# Altium PCB STM32智能储物柜.PcbDoc
Units mil, origin at the board's own origin, x right, y up, seen from the top; angles counter-clockwise.
Board outline 3605.31 x 2966.03 mil, 4 copper layers (Top Layer, GND02, PWR03, Bottom Layer), stack 23.754 mil thick; 30 components, 40 nets, 227 pads, 2 vias.
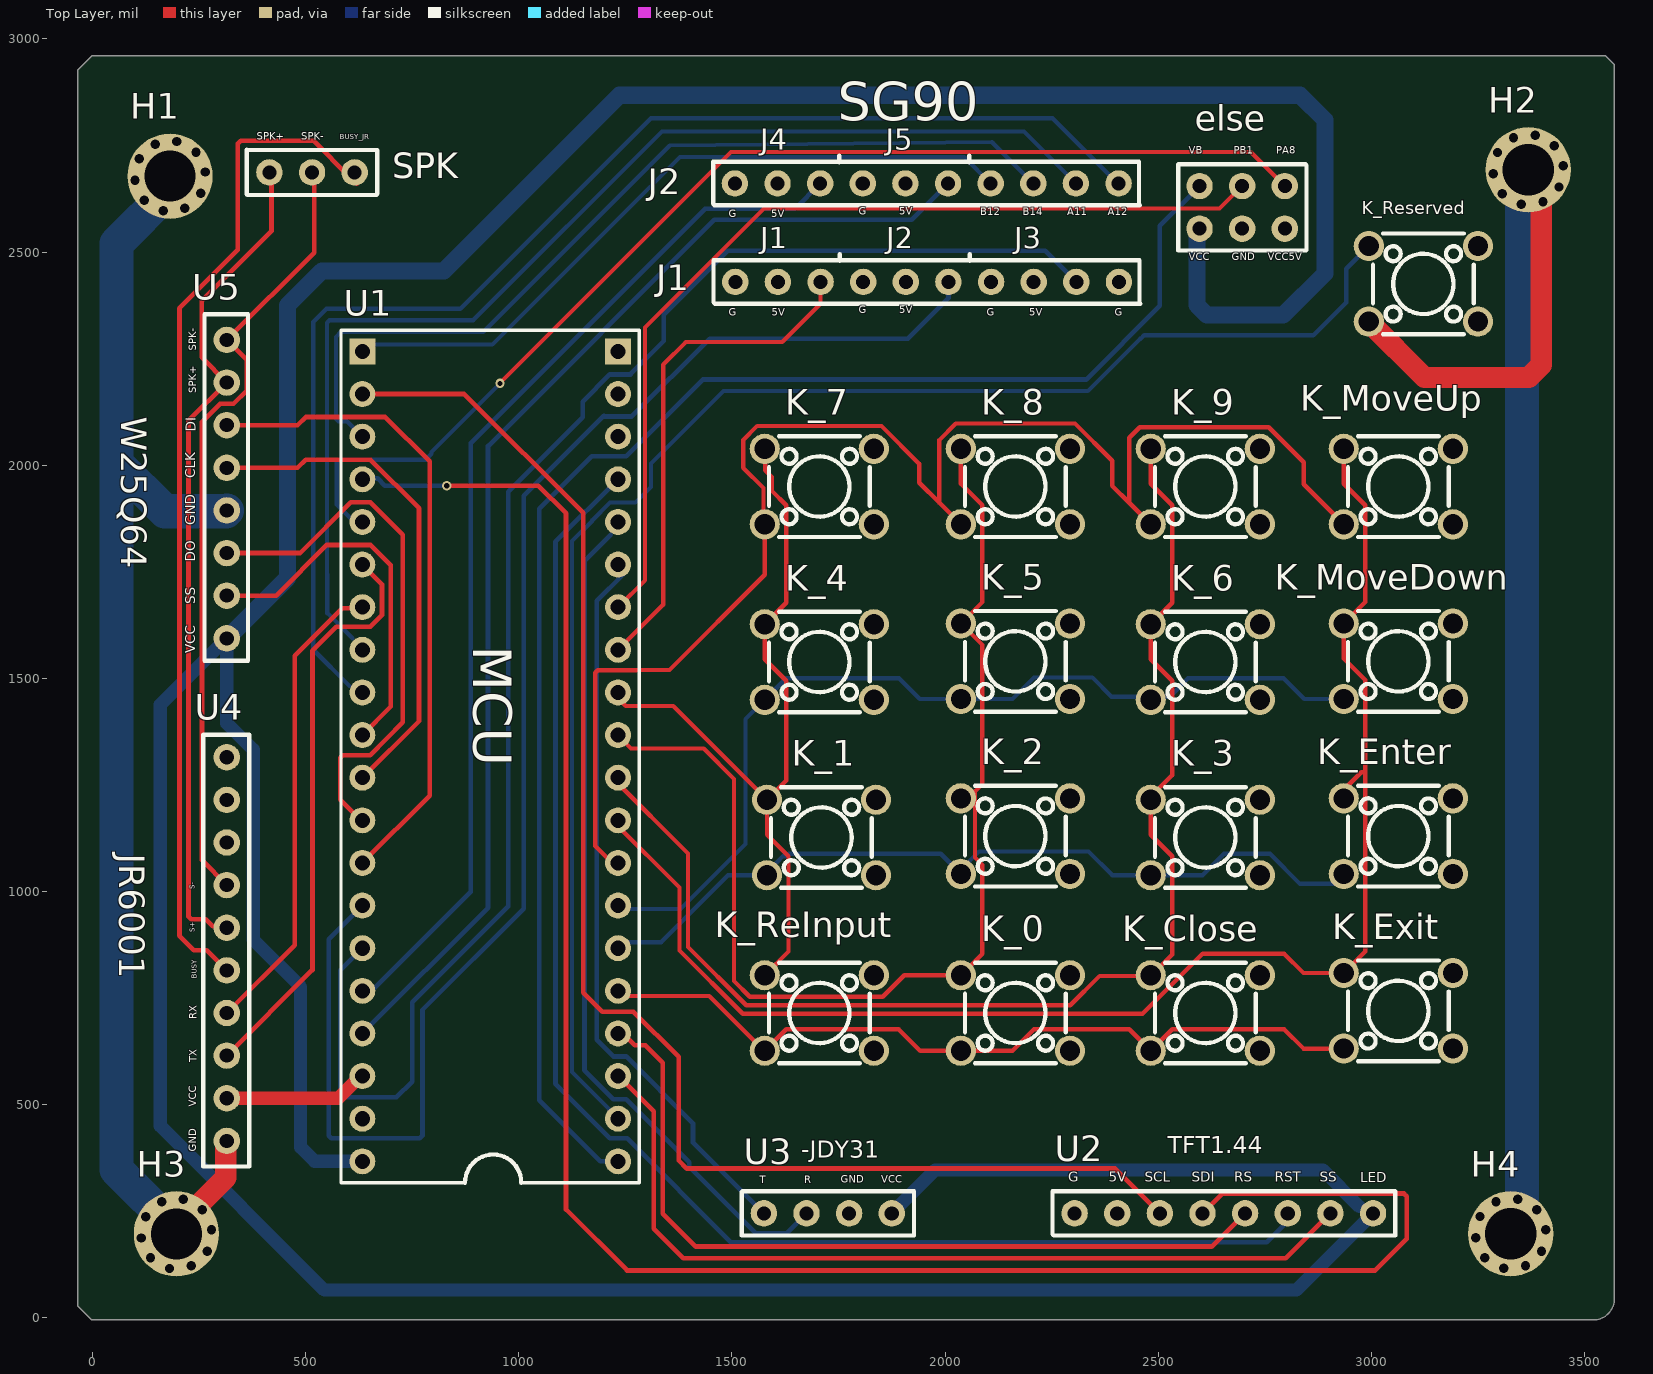
[diagram p0: Top Layer view]
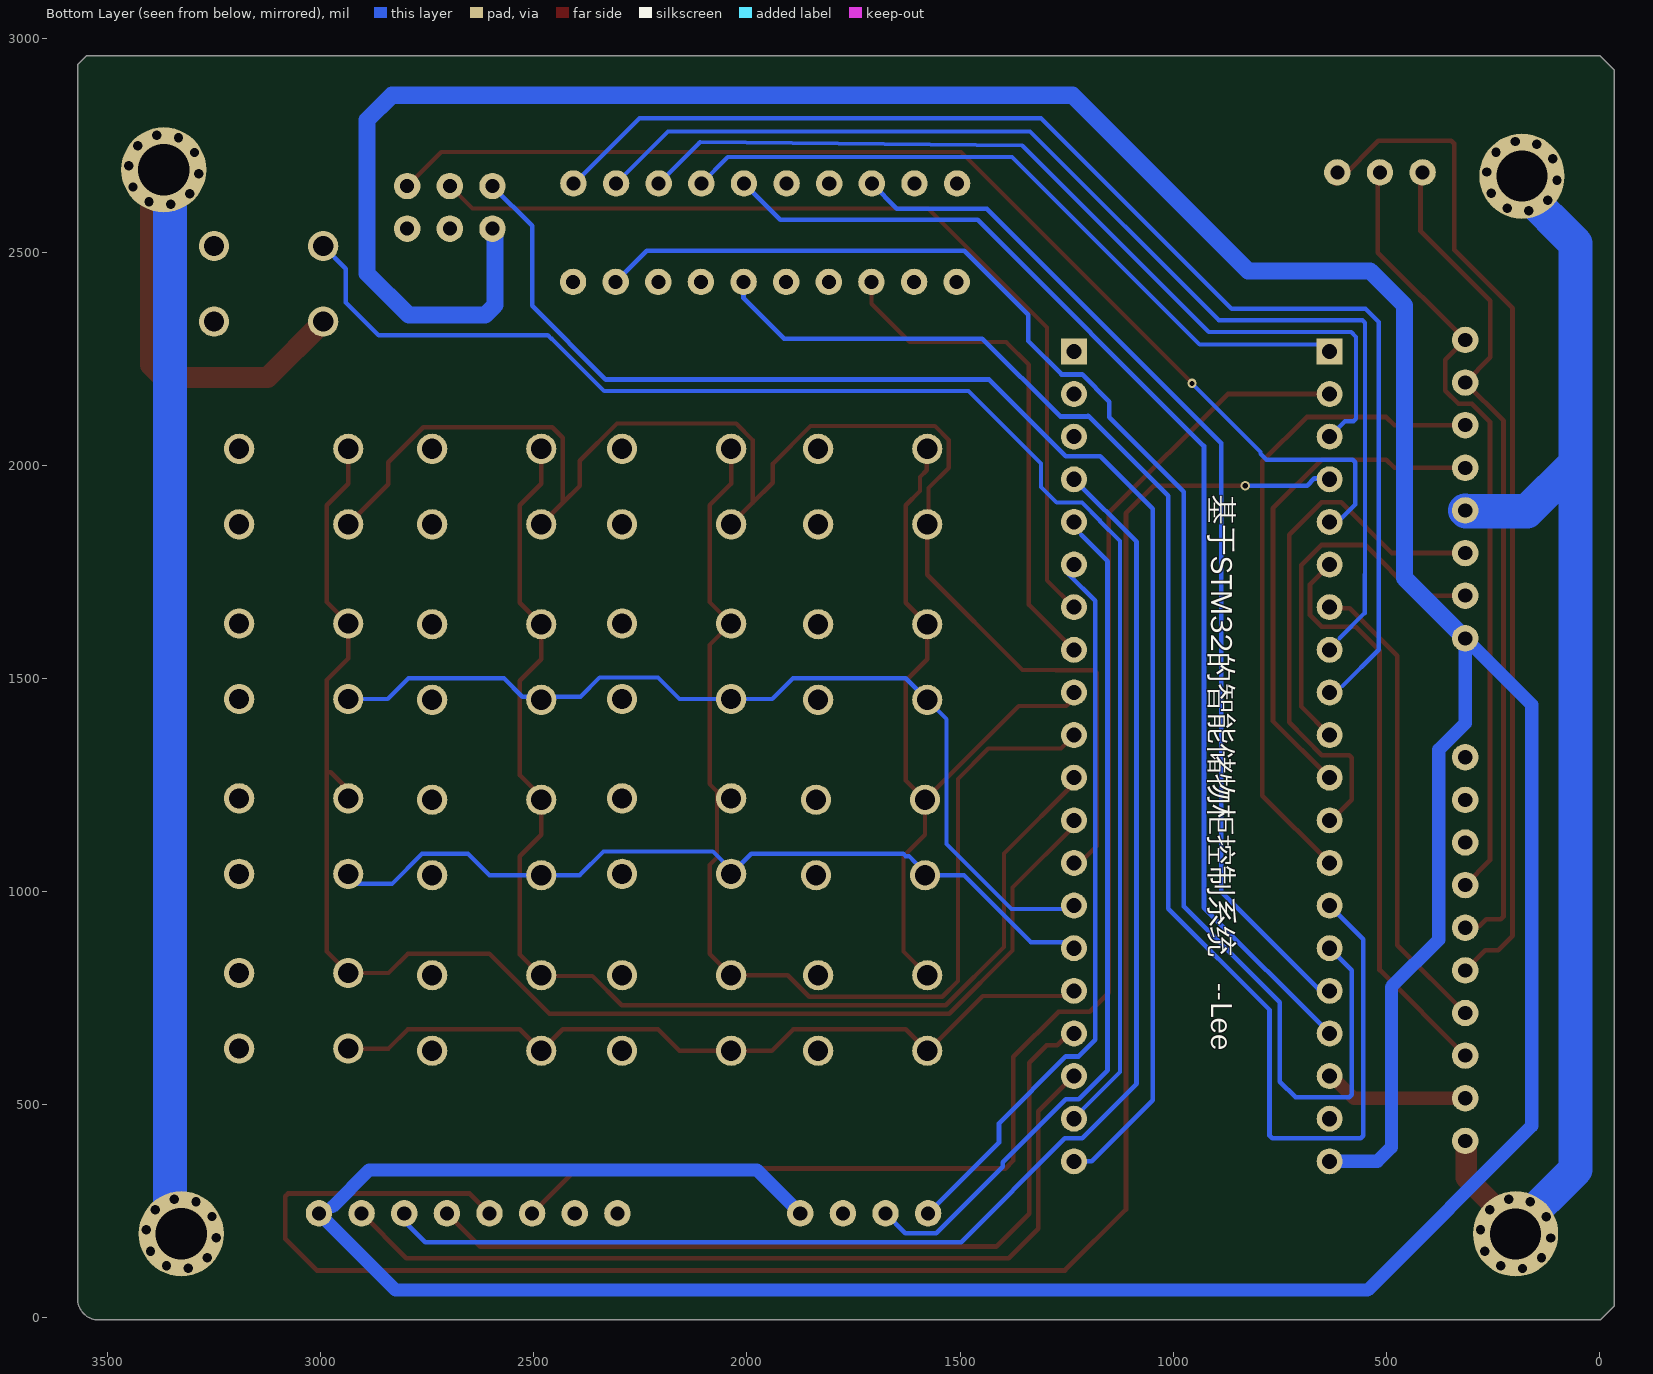
[diagram p1: Bottom Layer view, seen from below]
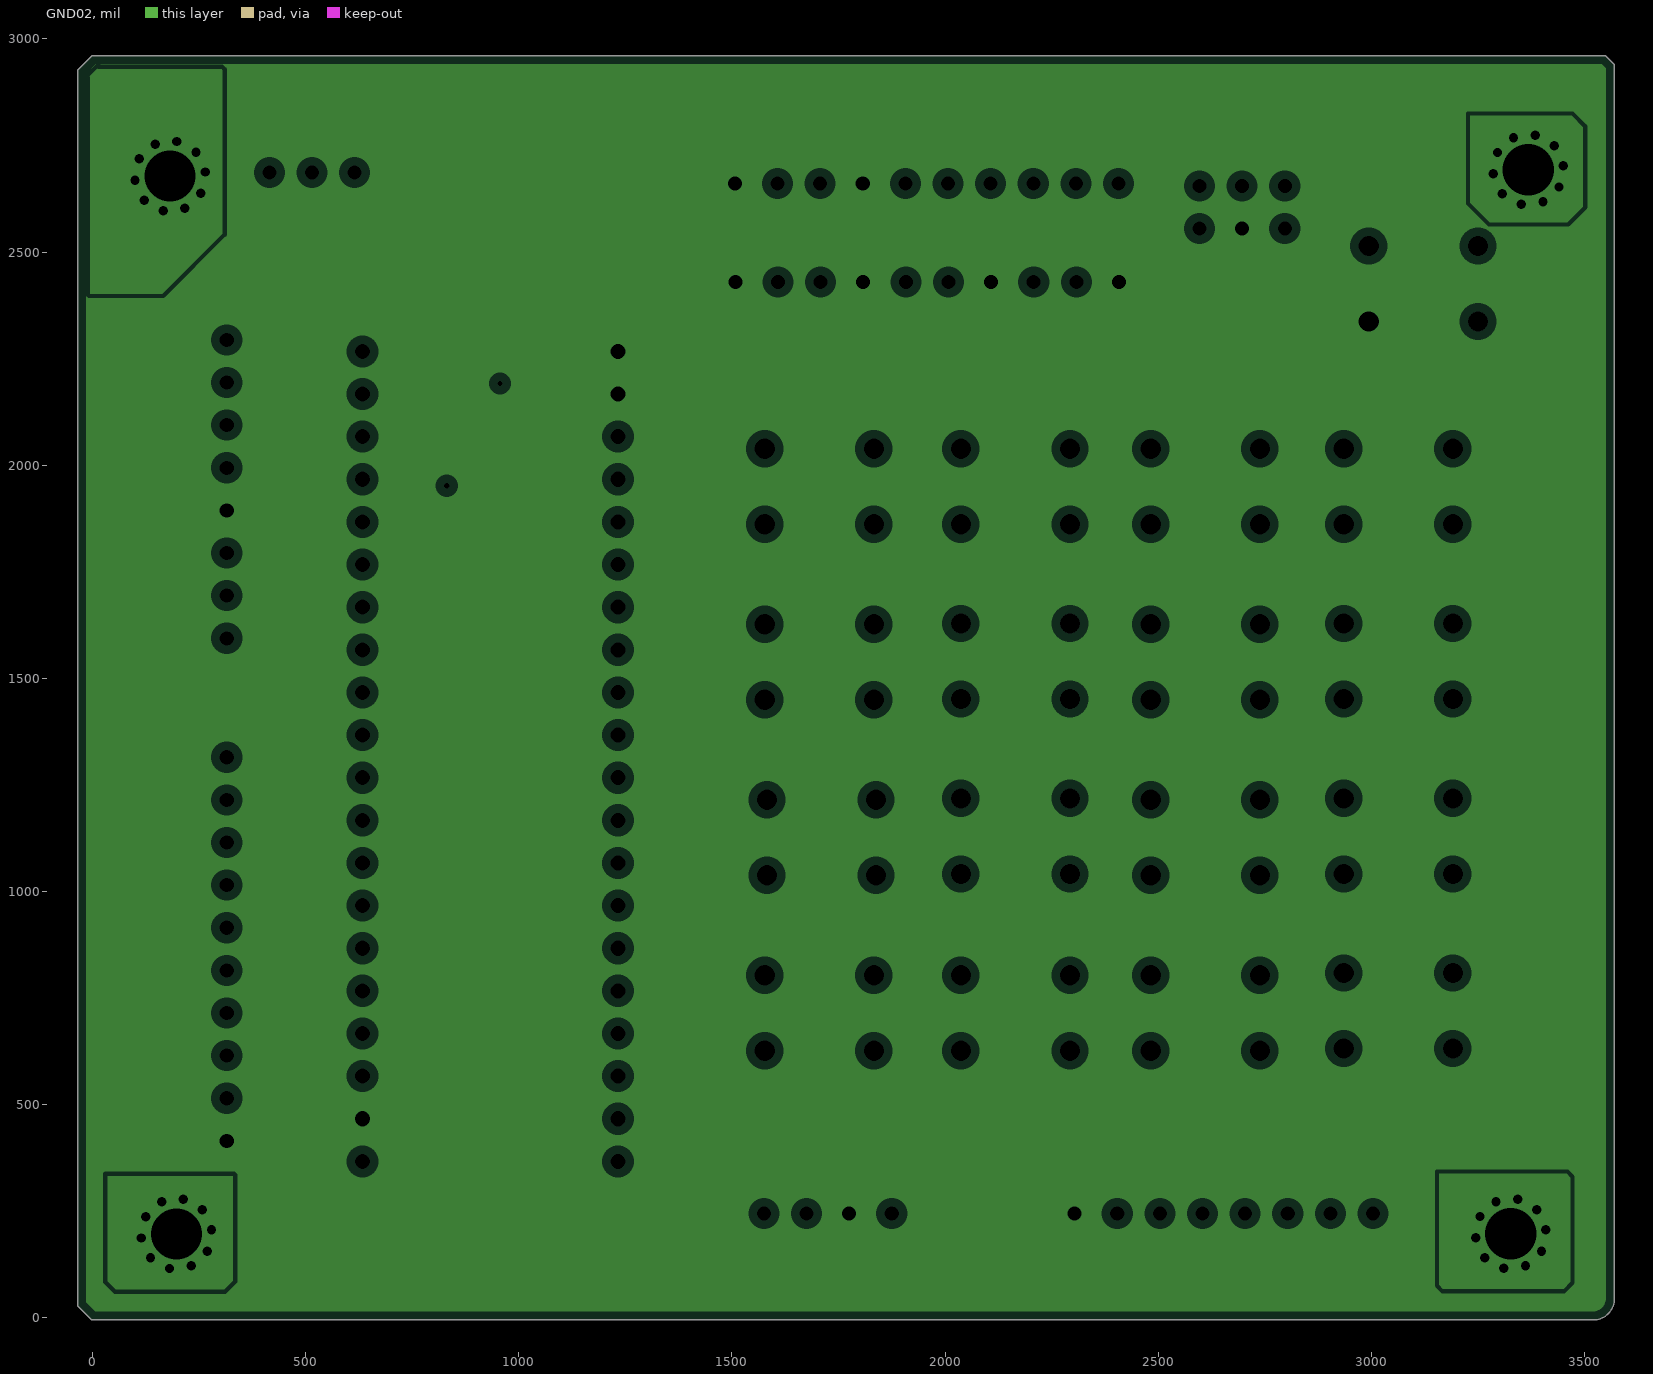
[diagram p2: GND02, clearances drawn from the general rule]
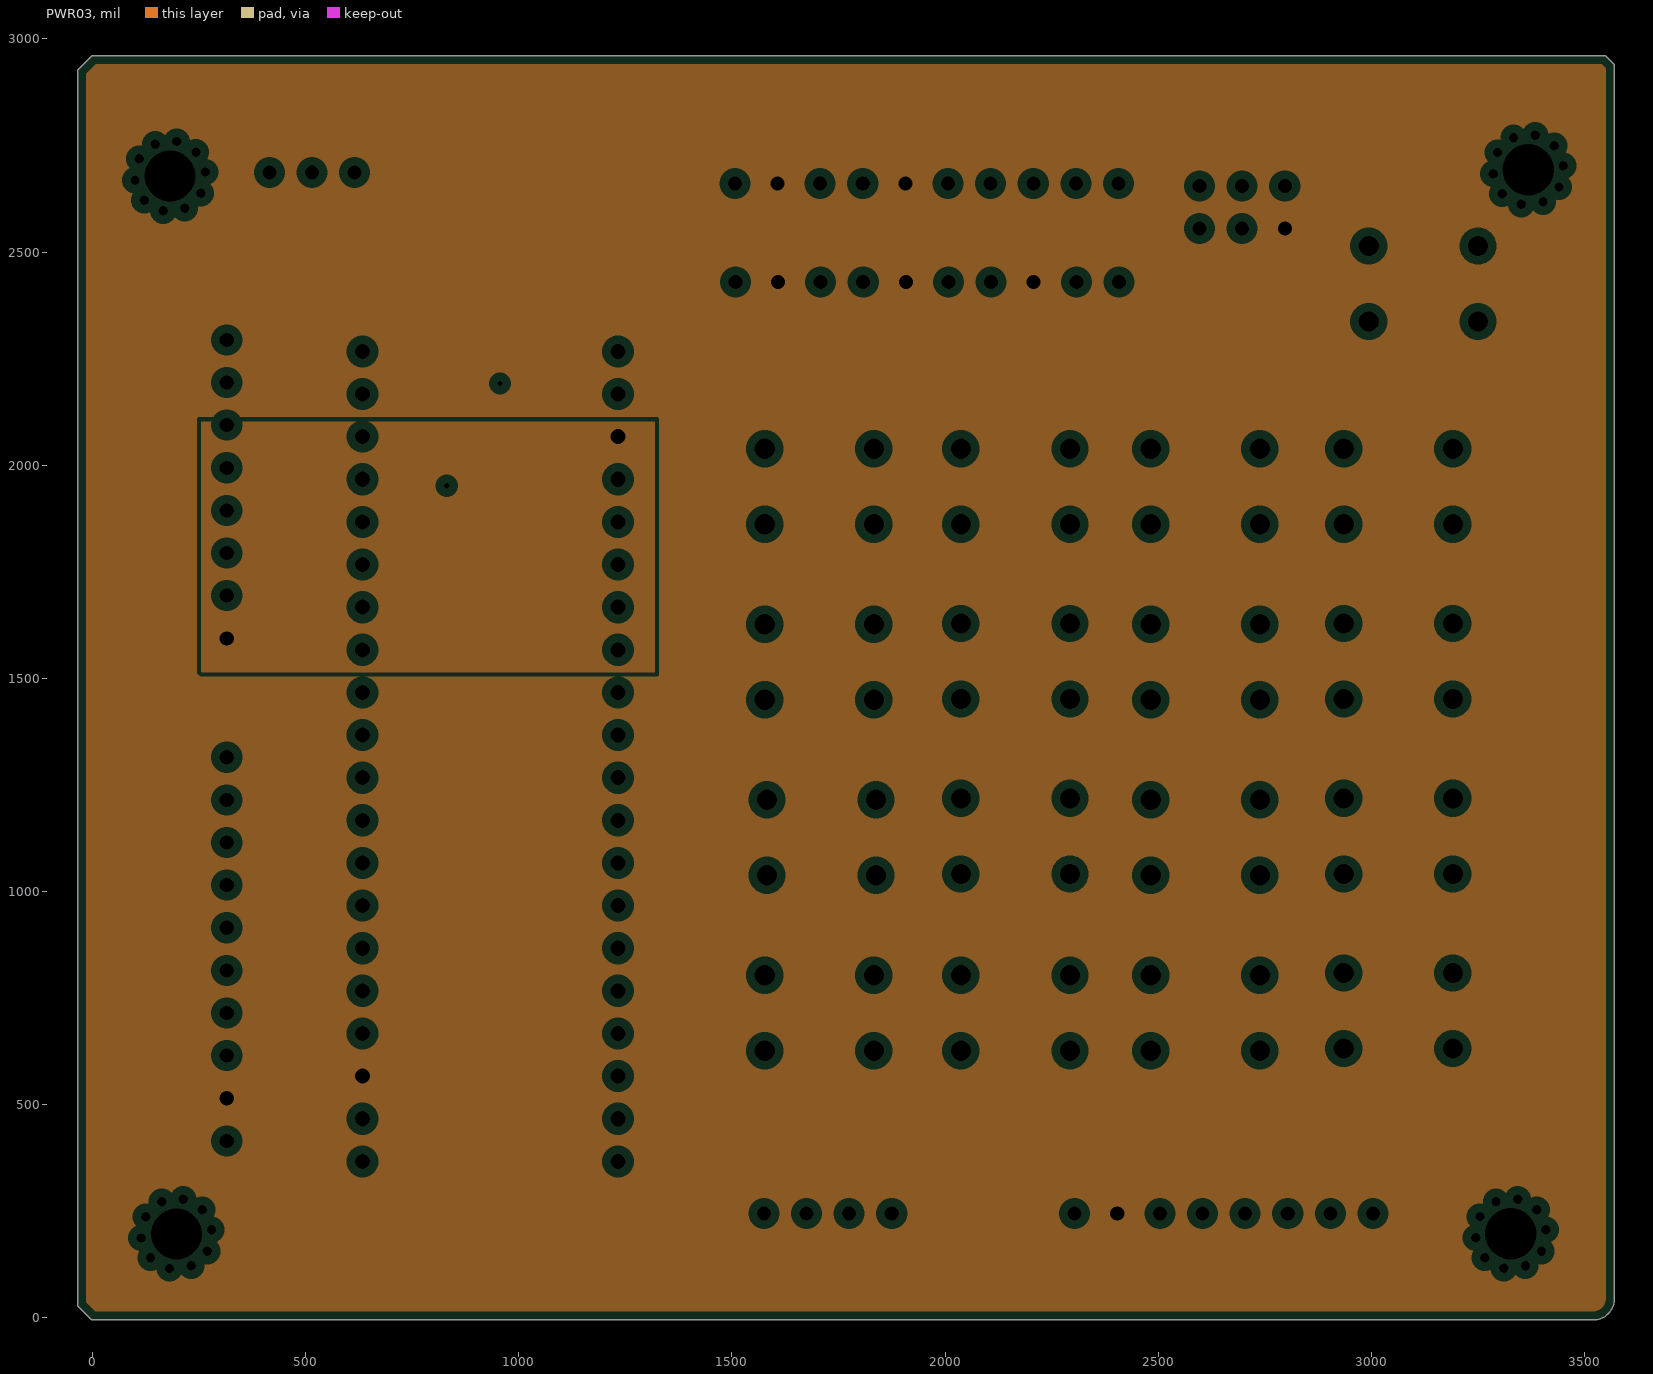
[diagram p3: PWR03, clearances drawn from the general rule]

## Layer stack, top to bottom
Top Solder: solder mask 0.4, Solder Resist, Dk 3.5
Top Layer: signal copper 1.4
Dielectric 2: prepreg 2.8, PP-006, Dk 4.1
GND02: plane copper 1.378, net GND
Dielectric 1: dielectric 12.5984, FR-4, Dk 4.8
PWR03: plane copper 1.378, net VCC5V
Dielectric 3: prepreg 2.8, PP-006, Dk 4.1
Bottom Layer: signal copper 1.4
Bottom Solder: solder mask 0.4, Solder Resist, Dk 3.5

## Board outline
0,-5.02 3525,-5.02 ccw(c3525,0) 3525.61,-4.98 ccw(c3520,45) 3569.98,39.37 ccw(c3520,45) 3569.99,39.52 ccw(c3520,45) 3570.29,45 ccw(c3520,45) 3570.01,50.27 3570.02,2815 3570.02,2938 ccw(c3565,2938) 3568.53,2941.56 3568.55,2941.55 3562.56,2947.53 3550.55,2959.55 3550.56,2959.53 ccw(c3547,2956) 3547,2961.02 1,2961.02 ccw(c1,2956) -2.56,2959.53 -2.55,2959.55 -33.55,2928.55 -33.53,2928.56 ccw(c-30,2925) -35.01,2925 -35.01,30 ccw(c-30,30) -33.53,26.44 -33.55,26.45 -3.55,-3.55 -3.58,-3.51 ccw(c0,0)

## Design rules (kind name [scope] priority, off if disabled: settings)
Clearance [All] p1: gap=10 ignorepadtopadclearanceinfootprint=FALSE except(0: Arc-Hole Track-Hole SMDPad-Hole THPad-Hole Via-Hole Fill-Hole Poly-Hole Region-Hole Text-Hole)
PlaneClearance [All] p1: clearance=20
PlaneConnect [All] p1: planeconnectstyle=Relief reliefexpansion=20 reliefentries=4 reliefconductorwidth=10 reliefairgap=10
PolygonConnect [All] p1: connectstyle=Relief reliefconductorwidth=10 reliefentries=4 polygonreliefangle="90 Angle" airgapwidth=10
RoutingVias [All] p1: holewidth=28 width=50 viastyle="Through Hole" minholewidth=28 minwidth=50 maxholewidth=28 maxwidth=50
SolderMaskExpansion [All] p1: expansion=4 istentingtop=FALSE
Width [InNetClass('VCC')] p1: maxlimit=32 minlimit=31 preferedwidth=31 minimp=50.000000 maximp=50.000000 favimp=50.000000
28 further rules are at their usual default settings.

## Classes and differential pairs
net class VCC: VCC VCC5V
net class GND: GND

## Components (designator, comment, footprint, x,y, rotation, side; value= is the part's Value field where it differs from the comment)
else "else_key&vcc" ELSE2*3PIN 2597,2655 r0 top (schematic designator else1)
H1 "固定孔" 铜柱孔#1 181.85,2678.15 r0 top
H2 "固定孔" 铜柱孔#1 3368.15,2693.15 r0 top
H3 "固定孔" 铜柱孔#2 196.85,196.85 r0 top
H4 "固定孔" 铜柱孔#1 3327,197 r0 top
J1 "SG90" SG90*3+1 1508,2430 r0 top
J2 "SG90" SG90*2+4 1507,2661 r0 top
K_0 "TS665CJ" SW-TH_4P-L6.0-W6.0-P4.50-LS6.5 2165,715 r0 top
K_1 "TS665CJ" SW-TH_4P-L6.0-W6.0-P4.50-LS6.5 1710,1126.67 r0 top
K_2 "TS665CJ" SW-TH_4P-L6.0-W6.0-P4.50-LS6.5 2165,1130 r0 top
K_3 "TS665CJ" SW-TH_4P-L6.0-W6.0-P4.50-LS6.5 2610.51,1126.67 r0 top
K_4 "TS665CJ" SW-TH_4P-L6.0-W6.0-P4.50-LS6.5 1705,1538.33 r0 top
K_5 "TS665CJ" SW-TH_4P-L6.0-W6.0-P4.50-LS6.5 2165,1540 r0 top
K_6 "TS665CJ" SW-TH_4P-L6.0-W6.0-P4.50-LS6.5 2610.51,1538.33 r0 top
K_7 "TS665CJ" SW-TH_4P-L6.0-W6.0-P4.50-LS6.5 1705,1950 r0 top
K_8 "TS665CJ" SW-TH_4P-L6.0-W6.0-P4.50-LS6.5 2165,1950 r0 top
K_9 "TS665CJ" SW-TH_4P-L6.0-W6.0-P4.50-LS6.5 2610.51,1950 r0 top
K_Close "TS665CJ" SW-TH_4P-L6.0-W6.0-P4.50-LS6.5 2610.51,715 r0 top
K_Enter "TS665CJ" SW-TH_4P-L6.0-W6.0-P4.50-LS6.5 3063.25,1130 r0 top
K_Exit "TS665CJ" SW-TH_4P-L6.0-W6.0-P4.50-LS6.5 3063.25,720 r0 top
K_MoveDown "TS665CJ" SW-TH_4P-L6.0-W6.0-P4.50-LS6.5 3063.25,1540 r0 top
K_MoveUp "TS665CJ" SW-TH_4P-L6.0-W6.0-P4.50-LS6.5 3063.25,1950 r0 top
K_ReInput "TS665CJ" SW-TH_4P-L6.0-W6.0-P4.50-LS6.5 1705,715 r0 top
K_Reserved "TS665CJ" SW-TH_4P-L6.0-W6.0-P4.50-LS6.5 3122.05,2425.42 r0 top
SPK "SpeakerPin3" SPEAKERPIN3 415,2687 r0 top
U1 "F103C8T6" HDR2X20 1233,2267 r270 top
U2 "TFT1.44" TFTPIN8 2304,245 r0 top
U3 "JDY31" 4PinJDY31 1575,245 r0 top
U4 "JR6001Pin10" JR6001PIN10 315,415 r90 top
U5 "W25Pin8&S+" W25Pin8&S+ 315,1594 r90 top

## Footprints (in the part's own frame and the unit in brackets; to place one, negate y for a bottom-side part, rotate by r counter-clockwise, add the part's x,y. Pads: shape width x height; smd on the part's side, far side on the other; paste and mask are expansions set on the pad)
4PinJDY31 [mil] "jdy31"
  round 62 hole 33 mask+4: 1(0,0) 2(100,0) 3(200,0) 4(300,0)
  silkscreen extent -52,-52 352,52
ELSE2*3PIN [mil] "其余IO&VCC"
  round 62 hole 33: 1(0,0) 1(0,0) 1(0,0) 1(0,0) 1(0,0) 1(0,0) 2(100,0) 2(100,0) 3(200,0) 3(200,0) 4(0,-100) 4(0,-100) 5(100,-100) 6(200,-100)
  silkscreen extent -50,-151 251,51
HDR2X20 [mil] "主控电路"
  round 61 hole 35.43: 1(1900,0) 2(1800,0) 3(1700,0) 4(1600,0) 5(1500,0) 6(1400,0) 7(1300,0) 8(1200,0) 9(1100,0) 10(1000,0) 11(900,0) 12(800,0) 13(700,0) 14(600,0) 15(500,0) 16(400,0) 17(300,0) 18(200,0) 19(100,0) 21(1900,-600) 22(1800,-600) 23(1700,-600) 24(1600,-600) 25(1500,-600) 26(1400,-600) 27(1300,-600) 28(1200,-600) 29(1100,-600) 30(1000,-600) 31(900,-600) 32(800,-600) 33(700,-600) 34(600,-600) 35(500,-600) 36(400,-600) 37(300,-600) 38(200,-600) 39(100,-600)
  rect 61x61 hole 35.43: 20(0,0) 40(0,-600)
  silkscreen extent -50,-650 1950,50
JR6001PIN10 [mil] "JR6001语音"
  round 62 hole 33: 1(0,0) 2(100,0) 3(200,0) 4(300,0) 5(400,0) 6(500,0) 7(600,0) 8(700,0) 9(800,0) 10(900,0)
  silkscreen extent -60,-53 953,55
SG90*2+4 [mil] "舵机*2"
  round 62 hole 33: 1(0,0) 1(0,0) 2(100,0) 3(200,0) 4(300,0) 5(400,0) 6(500,0) 7(600,0) 8(700,0) 8(700,0) 9(800,0) 10(900,0)
  silkscreen extent -51,-51 950,65
SG90*3+1 [mil] "舵机*3"
  round 62 hole 33: 1(0,0) 1(0,0) 2(100,0) 3(200,0) 4(300,0) 5(400,0) 6(500,0) 7(600,0) 8(700,0) 8(700,0) 9(800,0) 10(900,0)
  silkscreen extent -51,-51 950,65
SPEAKERPIN3 [mil] "喇叭Pin3"
  round 62 hole 33: 1(0,0) 1(0,0) 2(100,0) 3(200,0)
  silkscreen extent -53,-53 253,53
SW-TH_4P-L6.0-W6.0-P4.50-LS6.5 [mm] "矩阵键盘"
  round 1.8 hole 1.2: 1(-3.25,2.25) 2(3.25,2.25) 3(-3.25,-2.25) 4(3.25,-2.25)
  silkscreen extent -3,-3 3,3
TFTPIN8 [mil] "TFT1_44液晶屏"
  round 62 hole 33: 1(0,0) 1(0,0) 2(100,0) 3(200,0) 4(300,0) 5(400,0) 6(500,0) 7(600,0) 8(700,0)
  silkscreen extent -52,-52 752,52
W25Pin8&S+ [mil] "W25Q64"
  round 62 hole 33: 1(0,0) 1(0,0) 2(100,0) 3(200,0) 4(300,0) 5(400,0) 6(500,0) 6(500,0) 7(600,0)
  round 62 hole 33 paste+0 mask+4: 8(700,0)
  silkscreen extent -53,-50 760,52
铜柱孔#1 [mil]
  round 23 hole 22: 11(-82.21,-9.67) 11(-72.19,40.5) 11(-60.83,-56.14) 11(-34.6,75.2) 11(-16.21,-81.17) 11(16.21,81.17) 11(34.6,-75.2) 11(60.83,56.14) 11(72.19,-40.5) 11(82.21,9.67)
  round 200 hole 120: 11(0,0)
铜柱孔#2 [mil]
  round 200 hole 120: 3(0,0)
  round 23 hole 22: 11(-82.21,-9.67) 11(-72.19,40.5) 11(-60.83,-56.14) 11(-34.6,75.2) 11(-16.21,-81.17) 11(16.21,81.17) 11(34.6,-75.2) 11(60.83,56.14) 11(72.19,-40.5) 11(82.21,9.67)

## Part data
J1: library part SG90_1, "舵机"
J2: library part SG90_2, "舵机"
K_0 K_1 K_2 K_3 K_4 K_5 K_6 K_7 K_8 K_9 K_Close K_Enter K_Exit K_MoveDown K_MoveUp K_ReInput K_Reserved: "矩阵按键"
SPK: "喇叭"
U1: library part Header2*20, "主控电路", LatestRevisionDate=17-Jul-2002, LatestRevisionNote="Re-released for DXP Platform.", Publisher="Altium Limited"
U2: library part TFTPin8, "TFT液晶屏"
U3: library part 4Pin
U4: "语音"
U5: "FLASH"

## Via types
v1: diameter 22, hole 12, Top Layer to Bottom Layer, tented both sides, 2 vias

## Nets (pads, with @x,y where several pads share a name; then routed paths per layer and width w, separated by ;. In a path a pad name is that pad's centre, name@x,y a point inside that pad or via, vN(x,y) a via of type N, cw(c..) or ccw(c..) an arc to the next point about the centre after c; other vN are vias at no path point)
BUSY_JR: SPK.3 U4.5 | length 2383.4
  Top Layer w11: U4.5 268,862 238,862 204,896 204,2368 341,2505 341,2754.56 347.44,2761 519,2761 604,2676 SPK.3@620,2660
GND: else.5 H1.11 H2.11 H3.3 H3.11 H4.11 J1.1 J1.4 J1.7 J1.10 J2.1 J2.4 K_Reserved.3 U1.19 U1.20 U1.22 U2.1 U3.3 U4.1 U5.4 | length 6652.7
  Top Layer w50: H3.3 196.85,212.63 312.7,328.48 312.7,412.7 U4.1 ; K_Reserved.3 3124.95,2206 3369.15,2206 3398.44,2235.29 3398.44,2662.86 H2.11@3368.15,2693.15 ; H4.11@3304,220 H4.11@3327,197
  Bottom Layer w80: H1.11@181.85,2678.15 181.85,2645.68 56,2519.83 56,1998 ; H3.3 196.85,207.26 56,348.11 56,1998 ; U5.4 313,1892 170,1892 60,2002 56,1998 ; H4.11@3327,197 3353.9,223.9 3353.9,2678.9 H2.11@3368.15,2693.15
PA0: K_0.3 K_Close.3 K_Exit.3 K_ReInput.3 U1.5 | length 1888.4
  Top Layer w10: U1.5@1225,761.06 1231.06,755 1447,755 1575.58,626.42 K_ReInput.3 1627.48,676.85 1891.1,676.85 1941.54,626.42 K_0.3@2037.05,626.42 ; K_0.3@2039,624 2041.42,626.42 2158.46,626.42 2208.9,676.85 2432.13,676.85 K_Close.3 2532.99,676.85 2795.49,676.85 2840.92,631.42 K_Exit.3
PA1: K_1.3 K_2.3 K_3.3 K_Enter.3 U1.6 | length 1908.6
  Bottom Layer w10: U1.6@1225,861.06 1244.94,881 1334,881 1491.09,1038.09 K_1.3@1582.05,1038.09 ; 1605,1068 1620,1083 1628,1083 1633.52,1088.52 1989.95,1088.52 2037.05,1041.42 2037.05,1051.05 2080,1094 2336.59,1094 2392.5,1038.09 K_3.3 2603.98,1038.09 2654.41,1088.52 2762.2,1088.52 2832.72,1018 2946.28,1018 K_Enter.3@2952.14,1023.86
PA2: K_4.3 K_5.3 K_6.3 K_MoveDown.3 U1.7 | length 2170.8
  Bottom Layer w10: U1.7@1258,959 1379.23,959 1531.62,1111.38 1531.62,1404.32 K_4.3 1627.48,1500.19 1891.94,1500.19 1940.7,1451.42 2037.05,1451.42 2158.46,1451.42 2208.9,1501.85 2345.52,1501.85 2390.37,1457 2527,1457 2570.19,1500.19 2793.82,1500.19 2842.59,1451.42 K_MoveDown.3
PA3: K_7.3 K_8.3 K_9.3 K_MoveUp.3 U1.8 | length 3528.9
  Top Layer w10: U1.8@1225,1061.06 1225,1061.2 1203.99,1082.2 1203.86,1082.2 1179.5,1106.56 1179.5,1513.14 1185.36,1519 1275,1519 1275.5,1519.5 1353.5,1519.5 1577.05,1743.05 1577.05,1861.42 1574,1864.48 1574,1946.51 1526.62,1993.9 1526.62,2059.47 1559.15,2092 1850.85,2092 1939.62,2003.23 1939.62,1958.85 1986.62,1911.85 ; K_8.3@2037.05,1861.42 1986.62,1911.85 ; K_9.3 2432.13,1911.85 ; K_MoveUp.3 2841.5,1955.22 2841.5,2006.86 2759.35,2089.01 2456.86,2089.01 2432.13,2064.28 2432.13,1911.85 ; 1986.62,1911.85 1986.62,2059.47 2025.15,2098 2304.85,2098 2392.38,2010.47 2392.38,1951.6 2432.13,1911.85
PA4: K_Enter.1 K_Exit.1 K_MoveDown.1 K_MoveUp.1 U1.9 | length 3460.7
  Top Layer w10: U1.9@1225,1161.06 1376.78,1009.28 1376.78,861.65 1525.28,713.15 2463.45,713.15 2604.32,854.01 2795.49,854.01 2840.92,808.58 K_Exit.1 2985.74,859.01 2985.74,1279.74 2985.74,1496.1 2935.3,1546.54 K_MoveDown.1 ; K_MoveDown.1 2985.74,1679.01 2985.74,1906.1 2935.3,1956.54 K_MoveUp.1
  Top Layer w11: K_Enter.1 2935.31,1238.31 2976.74,1279.74 2985.74,1279.74 2986,1280
PA5: K_3.1 K_6.1 K_9.1 K_Close.1 U1.10 | length 2956.4
  Top Layer w10: U1.10@1225,1261.06 1396.78,1089.28 1396.78,869.93 1533.57,733.15 2293.84,733.15 2362.69,802 2483,802 2532.99,851.99 2532.99,1082.77 2482.56,1133.2 K_3.1 ; K_9.1 2482.56,1956.54 2532.99,1906.1 2532.99,1677.35 K_6.1 2482.56,1544.87 2532.99,1494.44 2532.99,1272.99 2505,1245
PA6: K_0.1 K_2.1 K_5.1 K_8.1 U1.11 | length 2695.5
  Top Layer w10: U1.11@1225,1361.06 1237.67,1361.06 1263.51,1335.22 1433.79,1335.22 1505,1264.01 1505,790 1541.85,753.15 1853.84,753.15 1904.27,803.58 2037.05,803.58 2087.48,854.01 2087.48,1062.31 2070,1079.79 2070,1235 2087.48,1252.48 2087.48,1578.15 K_5.1 2087.48,1679.01 2087.48,1906.1 2037.05,1956.54 K_8.1@2037.05,2038.57
PA7: K_1.1 K_4.1 K_7.1 K_ReInput.1 U1.12 | length 1819.2
  Top Layer w10: U1.12@1225,1461.06 1251.06,1435 1362.3,1435 K_1.1 ; K_ReInput.1 1632.48,859.01 1632.48,1082.77 1582.05,1133.2 K_1.1@1582.05,1215.24 ; K_7.1 1578.23,2037.4 1578.23,1988.15 1594,1972.37 1594,1939.59 1627.48,1906.1 1627.48,1677.35 K_4.1 1577.05,1544.87 1627.48,1494.44 1627.48,1260.68 K_1.1
PA8: else.3 U1.36 | length 2737.7
  Top Layer w10: v1(956,2192) 956,2193 1498,2735 2717,2735 else.3@2797,2655
  Bottom Layer w10: U1.36 614,1867 573,1908 573,2007.14 578.86,2013 781,2013 795,2027 795,2031 v1(956,2192)
PA9: U1.35 U4.3 | length 1368.7
  Top Layer w11: U4.3 516,816 516,1565 572,1621 652.05,1621 679,1647.95 679,1721 U1.35
PA10: U1.34 U4.4 | length 1109.9
  Top Layer w11: U4.4 474.1,874.1 474.1,1552.79 586,1664.7 630.7,1664.7 U1.34
PA11: J2.9 U1.33 | length 2758.5
  Bottom Layer w10: 610,1594 551,1653 551,1744 550,1745 550,2334.14 555.86,2340 893,2340 1336,2783 2185,2783 J2.9
PA12: J2.10 U1.32 | length 3037.7
  Bottom Layer w10: 603,1482 518,1567 518,2336.14 548.86,2367 863,2367 1310,2814 2252,2814 J2.10@2405,2661
PA15: U1.31 U5.2 | length 880
  Top Layer w11: U5.2 430.93,1694 549.93,1813 652.05,1813 699,1766.05 699,1766 700,1765 700,1434 U1.31
PB0: J1.3 U1.13 | length 1192.1
  Top Layer w10: U1.13 1339,1673 1339,2236 1392,2289 1618,2289 1708,2379 J1.3
PB1: else.2 U1.14 | length 2220.6
  Top Layer w10: U1.14 1295.88,1729.88 1295.88,2322.88 1575,2602 2644,2602 else.2@2697,2655
PB3: U1.30 U5.5 | length 1193.2
  Top Layer w11: U5.5 480.93,1994 499.93,2013 652.05,2013 766,1899.05 766,1400 U1.30
PB4: U1.29 U5.3 | length 1285.8
  Top Layer w11: U5.3 486.74,1794 605.74,1913 652.05,1913 728,1837.05 728,1396.95 690.03,1358.97 651.04,1319.99 587.44,1319.99 581,1313.54 581,1215 629,1167 U1.29
PB5: U1.28 U5.6 | length 1534.4
  Top Layer w11: U5.6@315,2094 480.93,2094 499.93,2113 687,2113 791,2009 791,1225 U1.28
PB6: J1.6 U1.27 | length 3622.1
  Bottom Layer w11: U1.27 554,888 554,427.44 560.44,421 767.56,421 774,427.44 774,722 1012,960 1012,1928 1199.87,2115.87 ; 1201.37,2114.37 1265.37,2114.37 1448,2297 1913,2297 2008,2392 J1.6
PB7: J1.9 U1.26 | length 3683.9
  Bottom Layer w11: U1.26 581,815 581,523.44 587.44,517 713,517 750,554 750,740 975,965 975,1938 1150,2113 1150,2149.05 1213.95,2213 1261.92,2213 1340.33,2291.41 1340.33,2353.33 1490,2503 2154,2503 2235,2503 J1.9
PB8: J2.3 U1.25 | length 2474.3
  Bottom Layer w11: U1.25 655,767 887,999 887,2052 1437,2602 1648.24,2602 J2.3@1706.3,2660.07
PB9: J2.6 U1.24 | length 2834.3
  Bottom Layer w11: U1.24 928,962 928,2044.92 1459.08,2576 1922,2576 J2.6
PB10: U1.15 U3.1 | length 1704.2
  Bottom Layer w11: U1.15@1244.65,1743.7 1183,1682.05 1183,651.95 1221.95,613 1252.05,613 1408.65,456.41 1408.65,411.35 U3.1
PB11: U1.16 U3.2 | length 1986.7
  Bottom Layer w11: 1216,1837 1154,1775 1154,580.95 1221.95,513 1252.05,513 1399.9,365.16 1399.9,354.34 1555.74,198.5 1628.5,198.5 U3.2
PB12: J2.7 U1.40 | length 1688.6
  Bottom Layer w10: U1.40 649,2283 938,2283 1378,2723 2045,2723 J2.7
PB13: U1.39 U2.3 | length 3468.5
  Top Layer w11: U1.39 872,2167 1151,1888 1151,763 1196,718 1269,718 1375,612 1375,369 1394,350 2399,350 U2.3
PB14: J2.8 U1.38 | length 2133.7
  Bottom Layer w10: U1.38 597,2103 576.86,2103 571,2108.86 571,2301 582.5,2312.5 916.5,2312.5 1354.06,2750.06 2109.98,2758.02 2112.95,2755.05 J2.8@2207,2661
PB15: U1.37 U2.4 | length 4776.8
  Top Layer w11: v1(831,1952) 1046,1952 1111,1887 1111,254 1254,111 3009,111 3082.94,184.94 3082.94,285.06 3076.5,291.5 2650.5,291.5 U2.4
  Bottom Layer w11: 664,1969 669,1969 686,1952 v1(831,1952)
PC13: K_Reserved.1 U1.2 | length 3634.7
  Bottom Layer w10: U1.2 1233,468.5 1125,576.5 1125,1822 1172.58,1869.58 1172.58,1870.92 1214.15,1912.5 1273.5,1912.5 1310,1949 1310,2004 1480,2174 2335,2174 2457.47,2296.47 2458.53,2296.47 2467.05,2305 2863.97,2305 2941,2382.03 2941,2460.89 K_Reserved.1
PC14: U1.3 U2.7 | length 2052.5
  Top Layer w11: U1.3 1234,567 1317,484 1317,209 1386,140 2799,140 U2.7
PC15: U1.4 U2.5 | length 1918.1
  Top Layer w11: U1.4 1244.46,667 1271.96,639.49 1297.06,639.49 1338,598.56 1338,244 1415,167 2626,167 U2.5
RST: U1.17 U2.6 | length 3384
  Bottom Layer w11: U1.17 1086,1820 1086,548.95 1213.95,421 1254,421 1497.5,177.5 2754.5,177.5 U2.6@2813,236
SPK+: SPK.1 U4.6 U5.7 | length 1914.5
  Top Layer w11: 282,919 266,935 231.44,935 225,941.44 225,2104 U5.7 256,2253 256,2385.6 420,2549.6 SPK.1@420,2660
SPK-: SPK.2 U4.7 U5.8 | length 1834.9
  Top Layer w11: U4.7 257,1073 257,2101.76 299.24,2144 330.76,2144 361.5,2174.74 361.5,2247.5 U5.8 520,2499 SPK.2@520,2660
VB: else.1 U1.1 | length 3604.9
  Bottom Layer w11: U1.1 1191,367 1048,510 1048,1898 1171,2021 1252.05,2021 1432.05,2201 2331,2201 2504,2374 2504,2562 else.1@2597,2655
VCC: else.4 U1.18 U1.21 U2.8 U3.4 U5.1 | length 11281.8
  Bottom Layer w31: U5.1@316,1594 U5.1@315,1594 ; U1.21 520.98,367 487.99,399.99 487.99,776.01 377,887 377,1332.9 315,1394.9 U5.1@315,1594 ; U3.4 1977,347 2886,347 2972,261 ; U2.8 2824,65 544,65 159,450 159,1438 U5.1@315,1594
  Bottom Layer w40: U5.1@316,1594 457,1735 457,2375 538,2456 824,2456 1236,2868 2833,2868 2891,2810 2891,2450 2793,2352 2614.43,2352 2591,2375.43 2591,2533.44 2592.79,2535.23 2592.79,2550.79 else.4@2597,2555
VCC5V: else.6 J1.2 J1.5 J1.8 J2.2 J2.5 U1.23 U2.2 U4.2 | length 347.9
  Top Layer w31: U4.2 576.11,515 628.11,567 U1.23
  Bottom Layer w31: U4.2@315,506.61 U4.2
pads on no net: K_0.2 K_0.4 K_1.2 K_1.4 K_2.2 K_2.4 K_3.2 K_3.4 K_4.2 K_4.4 K_5.2 K_5.4 K_6.2 K_6.4 K_7.2 K_7.4 K_8.2 K_8.4 K_9.2 K_9.4 K_Close.2 K_Close.4 K_Enter.2 K_Enter.4 K_Exit.2 K_Exit.4 K_MoveDown.2 K_MoveDown.4 K_MoveUp.2 K_MoveUp.4 K_ReInput.2 K_ReInput.4 K_Reserved.2 K_Reserved.4 U4.8 U4.9 U4.10

## Polygon pours and split planes (outlines as drawn)
GND on GND02 (split plane): 3548.35,2933.32 3549.92,2931.75 3549.92,2815 3549.92,50.27 3550.12,48.17 3550.04,48.16 3550.24,45.51 3550.19,45 3550.24,44.49 3550.03,41.71 3550.02,41.62 3549.91,40.26 3548.8,35.64 3546.98,31.25 3544.5,27.2 3541.41,23.59 3537.8,20.5 3533.75,18.02 3529.36,16.2 3525,15.15 3525,16.33 3523.09,15.54 3523.15,15.08 6.25,15.08 -14.92,36.25 -14.92,2396.86 -14.6,2396.4 -11.6,2393.4 -9.95,2392.29 -8,2391.9 166,2391.9 167.95,2392.29 169.6,2393.4 313.6,2537.4 314.71,2539.05 315.1,2541 315.1,2929 314.71,2930.95 313.6,2932.6 307.6,2938.6 305.95,2939.71 304,2940.1 19.1,2940.1 18.93,2940.92 3540.75,2940.92
GND on GND02 (split plane): -13.64,2919.67 -14.09,2919.58 7.25,2940.92 7.61,2940.92
GND on GND02 (split plane): 12.05,2930.29 14,2929.9 301.89,2929.9 304.9,2926.89 304.9,2543.11 163.89,2402.1 -5.89,2402.1 -5.9,2402.11 -5.9,2910 -6.29,2911.95 -6.55,2912.34 11.66,2930.55
GND on GND02 (split plane): 329.9,332.89 329.9,87.11 308.89,66.1 55.11,66.1 35.1,86.11 35.1,332.9 329.89,332.9
GND on GND02 (split plane): 3466.9,328.89 3466.9,84.11 3449.89,67.1 3169.11,67.1 3159.1,77.11 3159.1,337.9 3457.89,337.9
GND on GND02 (split plane): 3496.9,2792.89 3496.9,2607.11 3459.89,2570.1 3278.11,2570.1 3232.1,2616.11 3232.1,2819.9 3469.89,2819.9
VCC5V on PWR03 (split plane): 3548.35,2933.32 3549.92,2931.75 3549.92,2815 3549.92,50.27 3550.12,48.17 3550.04,48.16 3550.24,45.51 3550.19,45 3550.24,44.49 3550.03,41.71 3550.02,41.62 3549.91,40.26 3548.8,35.64 3546.98,31.25 3544.5,27.2 3541.41,23.59 3537.8,20.5 3533.75,18.02 3529.36,16.2 3525,15.15 3525,16.33 3523.09,15.54 3523.15,15.08 6.25,15.08 -14.92,36.25 -14.92,2918.75 7.25,2940.92 3540.75,2940.92
VCC on PWR03 (split plane): 1319.29,1514.1 257.11,1514.1 255.1,1516.11 255.1,2102.9 1319.29,2102.9

## Other copper
GND02 (plane layer: these items are gaps in the copper):
  lines w10: -12.95,2914.71 -11.39,2914.71 14,2940.1 ; -11,2910 -11,2400 -8,2397 166,2397 310,2541 310,2929 304,2935 14,2935 ; 30,84 30,338 332,338 335,335 335,85 311,61 53,61 30,84 ; 3154,75 3154,343 3460,343 3472,331 3472,82 3452,62 3167,62 3154,75 ; 3227,2614 3227,2825 3472,2825 3502,2795 3502,2605 3462,2565 3276,2565 3227,2614
PWR03 (plane layer: these items are gaps in the copper):
  region: 199,2161
  lines w10: 250,1514 250,2108 259,2108 1076,2108 1324.39,2108 1324.39,1509 255,1509 250,1514

## Silkscreen, mask and mechanical layers (free items; w line width, h text height)
Top Overlay:
  text "SG90" at 1748,2808 h90
  text "W25Q64" at 68,2114 h60 r270
  text "JR6001" at 63,1088 h60 r270
  text "TFT1.44" at 2522,386 h40
  text "-JDY31" at 1663,375 h40
Bottom Overlay:
  text "基于STM32的智能储物柜控制系统   --Lee" at 927.84,1930.3 h90 r90
Mechanical 1:
  lines w10: 3565,40 3565,2815 3565,2938 3559,2944 3547,2956 1,2956 -30,2925 -30,2805 -30,30 0,0 ; 3565,50 cw(c3520,45) 3525,0 ; 0,0 3525,0 ; 0,0 0,0 ; 3525,0 3525,0

## Text inside footprints (layer, text, board x,y; h text height)
else: Top Overlay "VB" at 2572.03,2725 h30; Top Overlay "PB1" at 2677,2725 h30; Top Overlay "PA8" at 2777,2725.33 h30; Top Overlay "VCC" at 2572.03,2475.33 h30; Top Overlay "GND" at 2672,2475.33 h30; Top Overlay "VCC5V" at 2757.03,2475.33 h30
J1: Top Overlay "G" at 2098,2345.33 h30; Top Overlay "G" at 1493,2345.33 h30; Top Overlay "5V" at 1893,2350.33 h30; Top Overlay "5V" at 1593,2345.33 h30; Top Overlay "G" at 1798,2350.33 h30; Top Overlay "5V" at 2198,2345.33 h30; Top Overlay "J2" at 1862,2509 h50; Top Overlay "J3" at 2162,2509 h50; Top Overlay "G" at 2398,2345.36 h30
J2: Top Overlay "G" at 1492,2576.33 h30; Top Overlay "5V" at 1892,2581.33 h30; Top Overlay "5V" at 1592,2576.33 h30; Top Overlay "G" at 1797,2581.33 h30; Top Overlay "J4" at 1566,2740 h50; Top Overlay "J5" at 1861,2740 h50; Top Overlay "A11" at 2287,2581 h30; Top Overlay "A12" at 2382,2581 h30; Top Overlay "B12" at 2082,2581 h30; Top Overlay "B14" at 2182,2581 h30
SPK: Top Overlay "BUSY_JR" at 580,2760.55 h20; Top Overlay "SPK+" at 385,2757.33 h30; Top Overlay "SPK-" at 490,2757.33 h30
U1: Top Overlay "MCU" at 893,1577 h90 r270
U2: Top Overlay "LED" at 2974,310 h40; Top Overlay "SS" at 2879,310.48 h40; Top Overlay "RST" at 2774,310.48 h40; Top Overlay "RS" at 2679,310.48 h40; Top Overlay "SDI" at 2579,310.48 h40; Top Overlay "SCL" at 2469,310.48 h40; Top Overlay "5V" at 2384,310.48 h40; Top Overlay "G" at 2289,310.48 h40
U3: Top Overlay "VCC" at 1850,310.33 h30; Top Overlay "GND" at 1755,310.36 h30; Top Overlay "R" at 1670,310 h30; Top Overlay "T" at 1565,310 h30
U4: Top Overlay "S-" at 244.78,1005 h20 r90; Top Overlay "S+" at 244.78,905 h20 r90; Top Overlay "BUSY" at 249.78,795 h20 r90; Top Overlay "RX" at 250,700 h30 r90; Top Overlay "TX" at 250,600 h30 r90; Top Overlay "VCC" at 249.67,495.03 h30 r90; Top Overlay "GND" at 249.67,390 h30 r90
U5: Top Overlay "DI" at 250,2079 h40 r90; Top Overlay "CLK" at 249.56,1969 h40 r90; Top Overlay "GND" at 249.56,1859 h40 r90; Top Overlay "DO" at 249.56,1774 h40 r90; Top Overlay "SS" at 249.56,1674 h40 r90; Top Overlay "VCC" at 249.56,1559.04 h40 r90; Top Overlay "SPK+" at 249.67,2169 h30 r90; Top Overlay "SPK-" at 249.67,2269 h30 r90